# EAGLE board TMC2209_Camera_Slider_PCB_noPinguin (EAGLE 9.6.2)
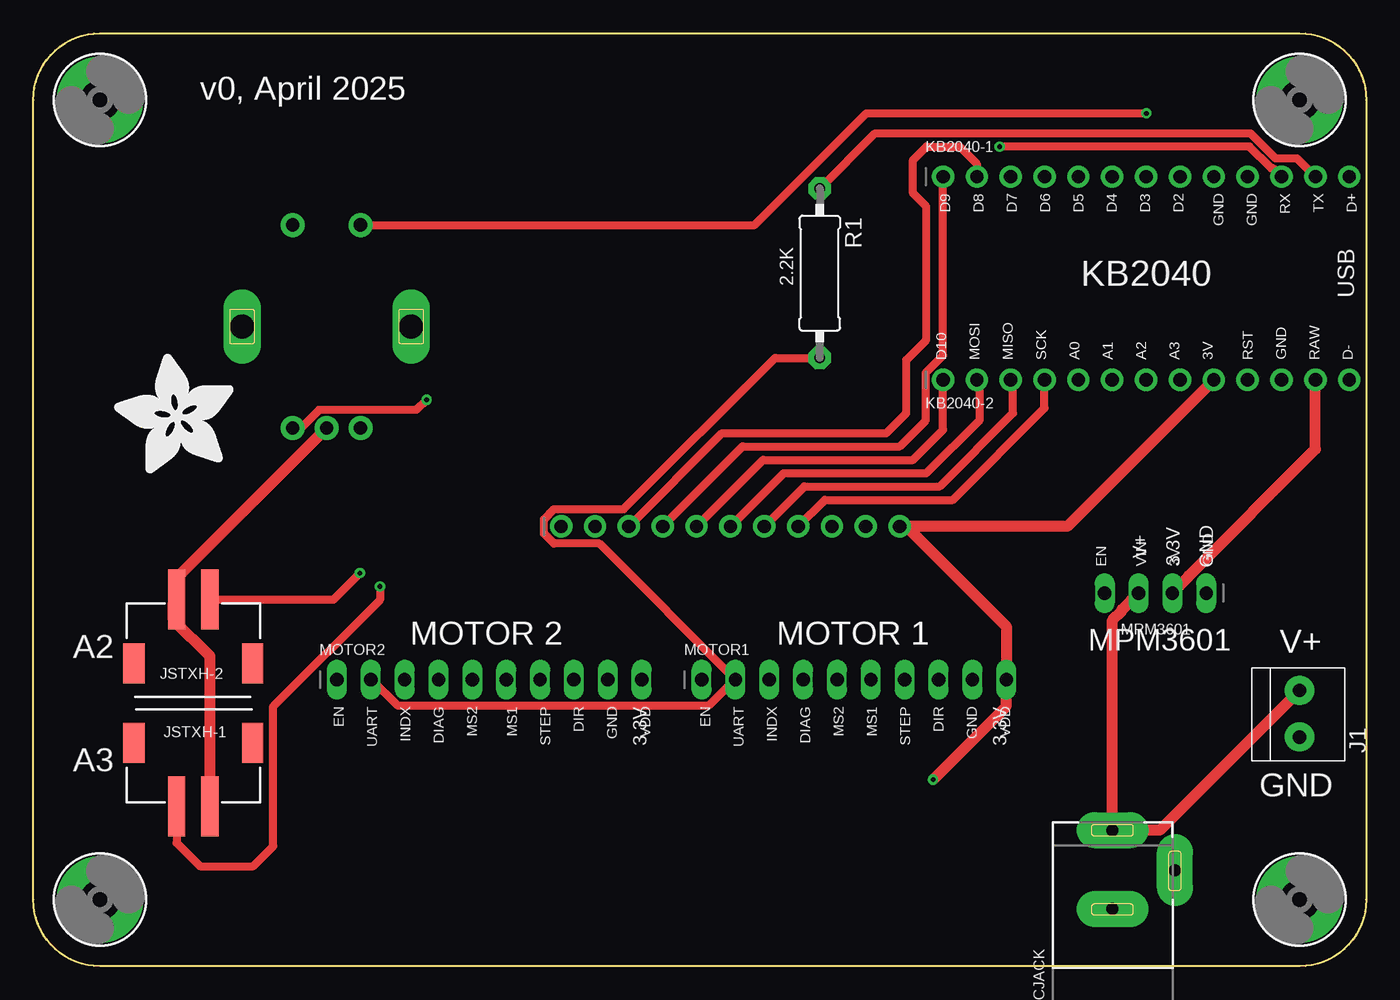
[diagram p0: board, top side]
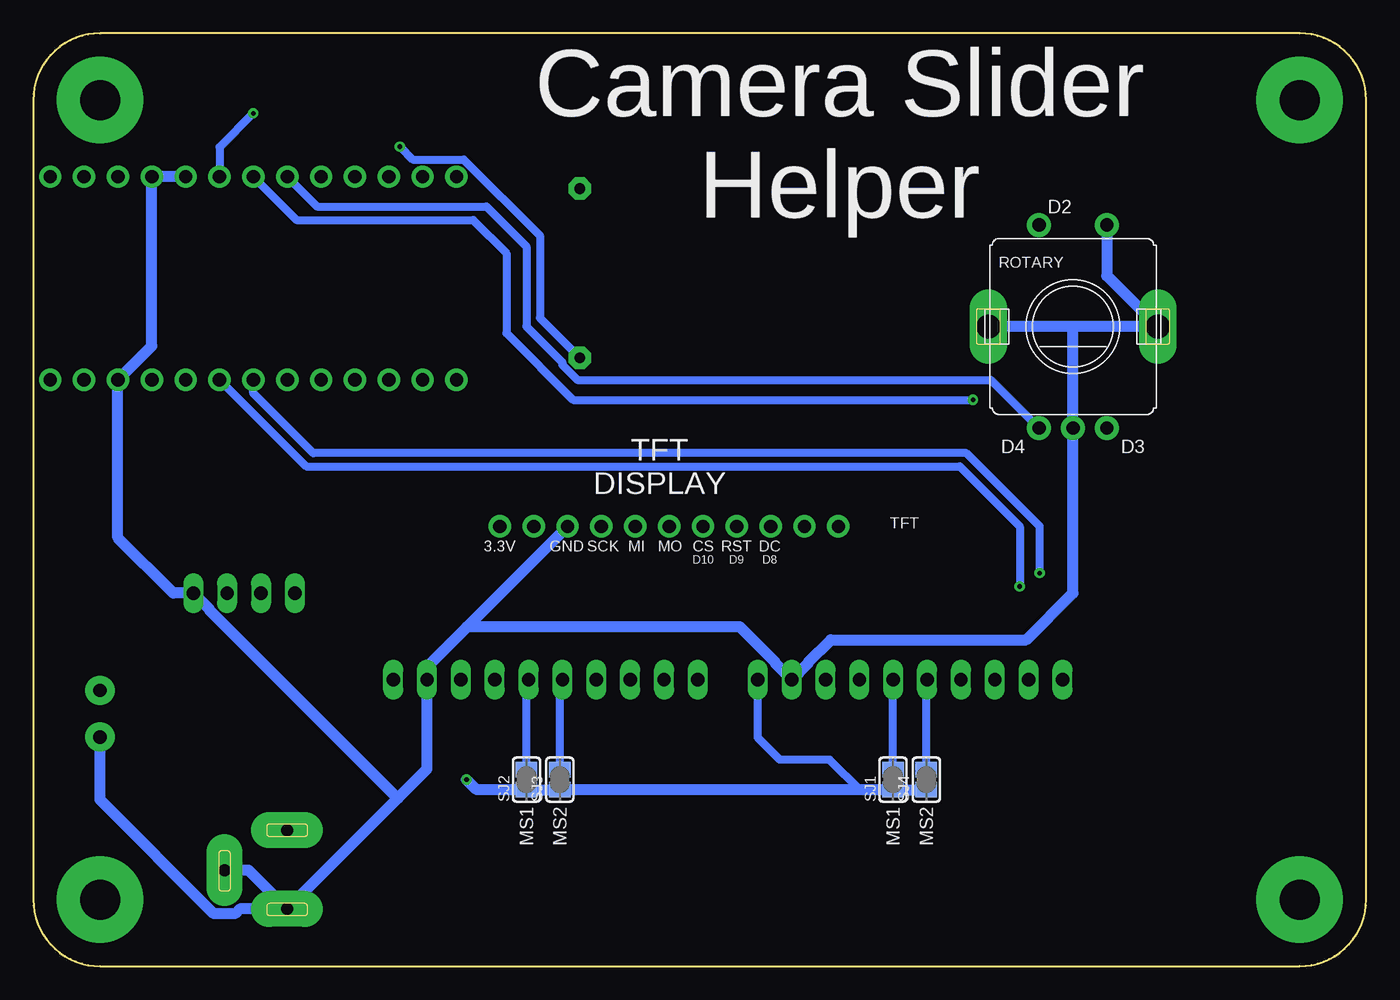
[diagram p1: board, bottom side, seen from below]

Size 100 x 70 mm. Coordinates in mm from the lower left corner, seen from the top.
Outline: 95,0 5,0 arc-90 0,5 0,65 arc-90 5,70 95,70 arc-90 100,65 100,5 arc-90 95,0
Copper layers (1*16): Top 0.035mm / dielectric 1.5mm / Bottom 0.035mm
Design rules "default *": minimum track width 6mil, minimum drill 0.35mm, track to track 6mil, track to pad 6mil, pad to pad 6mil, via to via 6mil, smd to smd 6mil, copper to edge 10mil, drill to drill 6mil, minimum pad ring 10mil, minimum via ring 8mil, stop-mask expansion 4mil, vias tented up to drill 0mil, thermal gap 10mil

## Footprints (pad centres in the part's own frame; a part is rotated, then mirrored left to right if it is on the bottom)
DCJACK_2MM_PTH = drill 0.9 pad 2.7 long: GND -2.9,2.54; GNDBREAK 0,-2.16; PWR 3,2.54
MOUNTINGHOLE_3.0_PLATED = drill 3 pad 6.452: P$1 0,0
1X2-3.5MM = drill 1 pad 2.184: 1 1.8,0; 2 -1.7,0
JST-XH-2-SV = smd 1.3 x 4.5: 1 -1.25,-2.014; 2 1.25,-2.014 | smd 1.6 x 3: MT1 -4.45,2.77; MT2 4.45,2.77
1X13_ROUND_70 = drill 1 pad 1.676: 1 -15.24,0; 2 -12.7,0; 3 -10.16,0; 4 -7.62,0; 5 -5.08,0; 6 -2.54,0; 7 0,0; 8 2.54,0; 9 5.08,0; 10 7.62,0; 11 10.16,0; 12 12.7,0; 13 15.24,0
1X10_OVAL = drill 1 long: 1 -11.43,0; 2 -8.89,0; 3 -6.35,0; 4 -3.81,0; 5 -1.27,0; 6 1.27,0; 7 3.81,0; 8 6.35,0; 9 8.89,0; 10 11.43,0
1X04_OVAL = drill 1 long: 1 -3.81,0; 2 -1.27,0; 3 1.27,0; 4 3.81,0
0309/12 = drill 0.813 pad 1.676 octagon: 1 -6.35,0; 2 6.35,0
PEC11+SWITCH = drill 1 pad 1.8: P$1 -2.54,7.62; P$2 2.54,7.62; P$A -2.54,-7.62; P$B 2.54,-7.62; P$C 0,-7.62 | drill 1.8 pad 2.8 long: P$GND1 -6.35,0; P$GND2 6.35,0
SOLDERJUMPER_CLOSEDWIRE = smd 1.168 x 1.6: 1 -0.762,0; 2 0.762,0 | smd 0.635 x 0.203: WIRE 0,0
SOLDERJUMPER_REFLOW = smd 1.168 x 1.6: 1 -0.762,0; 2 0.762,0
1X11_ROUND = drill 1 pad 1.676: 1 -12.7,0; 2 -10.16,0; 3 -7.62,0; 4 -5.08,0; 5 -2.54,0; 6 0,0; 7 2.54,0; 8 5.08,0; 9 7.62,0; 10 10.16,0; 11 12.7,0

## Placement (x,y rotation side)
DCJACK  [DCJACK_2MM_PTH]  83.5,7.2 90 top
E$1  [MOUNTINGHOLE_3.0_PLATED]  5,65 0 top
E$2  [MOUNTINGHOLE_3.0_PLATED]  95,65 0 top
E$3  [MOUNTINGHOLE_3.0_PLATED]  95,5 0 top
E$5  [MOUNTINGHOLE_3.0_PLATED]  5,5 0 top
J1  1X2-3.5MM  [1X2-3.5MM]  95,19 270 top
JSTXH-1  CON_JST_XH_2PIN-VERT  [JST-XH-2-SV]  12,14 0 top
JSTXH-2  CON_JST_XH_2PIN-VERT  [JST-XH-2-SV]  12,25.5 180 top
KB2040-1  [1X13_ROUND_70]  83.49,59.24 0 top
KB2040-2  [1X13_ROUND_70]  83.49,44 0 top
MOTOR1  [1X10_OVAL]  61.57,21.5 0 top
MOTOR2  [1X10_OVAL]  34.21,21.5 0 top
MPM3601  [1X04_OVAL]  84.19,28 180 top
R1  2.2K  [0309/12]  59,52 270 top
ROTARY  [PEC11+SWITCH]  22,48 0 bottom
SJ1  [SOLDERJUMPER_CLOSEDWIRE]  35.5,14 90 bottom
SJ2  [SOLDERJUMPER_REFLOW]  63,14 90 bottom
SJ3  [SOLDERJUMPER_REFLOW]  60.5,14 90 bottom
SJ4  [SOLDERJUMPER_REFLOW]  33,14 90 bottom
TFT  [1X11_ROUND]  52.3,33 0 top
U$1  [ADAFRUIT_9MM]  15,37 90 top

## Library data of the parts
DCJACK JSTXH-1 JSTXH-2 ROTARY = adafruit_electromech
E$1-E$3 E$5 KB2040-1 KB2040-2 MOTOR1 MOTOR2 MPM3601 SJ1-SJ4 TFT U$1 = microbuilder
J1 R1 = adafruit

## Nets
+3V3: KB2040-2.9 MOTOR1.10 MOTOR2.10 SJ1.1 SJ2.1 SJ3.1 SJ4.1 TFT.11
+5V: KB2040-2.12 MPM3601.2
A2: JSTXH-2.1 KB2040-2.7
A3: JSTXH-1.1 KB2040-2.8
CS: KB2040-2.1 TFT.5
D-: KB2040-2.13
DC: KB2040-1.2 TFT.3
EN_1: MOTOR1.1
EN_2: MOTOR2.1
ENC_A: KB2040-1.6 ROTARY.P$A
ENC_B: KB2040-1.7 ROTARY.P$B
ENC_BUTTON: KB2040-1.8 ROTARY.P$1
GND: DCJACK.GND DCJACK.GNDBREAK J1.1 JSTXH-1.2 JSTXH-2.2 KB2040-1.9 KB2040-1.10 KB2040-2.11 MOTOR1.9 MOTOR2.9 MPM3601.1 ROTARY.P$2 ROTARY.P$C ROTARY.P$GND1 ROTARY.P$GND2 TFT.9
LIT: TFT.1
MI: KB2040-2.3 TFT.7
MO: KB2040-2.2 TFT.6
MPM_EN: MPM3601.4
MS1_1: MOTOR1.6 SJ2.2
MS1_2: MOTOR2.6 SJ1.2
MS2_1: MOTOR1.5 SJ3.2
MS2_2: MOTOR2.5 SJ4.2
RST: KB2040-1.1 TFT.4
RX: KB2040-1.11 MOTOR1.2 MOTOR2.2 R1.2
SCK: KB2040-2.4 TFT.8
TX: KB2040-1.12 R1.1
VCC: DCJACK.PWR J1.2 MPM3601.3

## Tracks (layer width: path | path; a pad name or v marks a point on that pad's centre or on a via)
+3V3  (via drill 0.35)
  Top 0.813: v67.5,14 73,19.5 MOTOR1.10 73,25.5 65.5,33 TFT.11 77.57,33 KB2040-2.9
  Bottom 0.61: SJ1.1 38,13.24 40.26,15.5 44,15.5 45.64,17.14 MOTOR2.10
  Bottom 0.813: SJ4.1 SJ1.1 SJ3.1 61,13.24 SJ2.1 66.74,13.24 v67.5,14
+5V
  Top 0.813: MPM3601.2 86.69,29.23 86.69,29.3 96.19,38.8 KB2040-2.12
A2  (via drill 0.35)
  Top 0.61: JSTXH-2.1 22.51,27.51 v24.5,29.5
  Bottom 0.61: v24.5,29.5 24.5,33 30,38.5 79,38.5 83.49,42.99 KB2040-2.7
A3  (via drill 0.35)
  Top 0.61: v26,28.5 26,27.5 18,19.5 18,9 16.5,7.5 12.5,7.5 10.75,9.25 JSTXH-1.1
  Bottom 0.61: KB2040-2.8 79.53,37.5 30.5,37.5 26,33 v26,28.5
CS
  Top 0.61: TFT.5 54.76,38 66,38 68.25,40.25 KB2040-2.1
DC
  Top 0.61: TFT.3 51.68,40 64,40 65.5,41.5 65.5,45.5 67,47 67,57 66,58 66,60.5 67,61.5 69.5,61.5 70.79,60.21 KB2040-1.2
ENC_A
  Bottom 0.61: KB2040-1.6 78.71,57 66,57 63,54 63,48 60.3,45.3 60.3,45.11 59.18,44 28.16,44 ROTARY.P$A
ENC_B  (via drill 0.35)
  Top 0.61: ROTARY.P$B 20.08,40.38 21.44,41.74 28.74,41.74 v29.5,42.5
  Bottom 0.61: KB2040-1.7 80.25,56 67,56 64.5,53.5 64.5,47.5 59.5,42.5 v29.5,42.5
ENC_BUTTON  (via drill 0.35)
  Top 0.61: ROTARY.P$1 54.12,55.62 62.5,64 v83.5,64
  Bottom 0.61: v83.5,64 86.03,61.47 KB2040-1.8
GND
  Top 0.813: ROTARY.P$C 10.75,29.13 JSTXH-2.2 10.5,27.26 10.5,26 13.25,23.25 JSTXH-1.2
  Bottom 0.813: DCJACK.GND 72.63,12.63 | 72.63,12.63 70.46,14.8 MOTOR1.9 70.46,22.46 67.46,25.46 | TFT.9 67.46,25.46 | KB2040-1.9 KB2040-1.10 91.11,46.54 KB2040-2.11 93.65,32.15 89.5,28 MPM3601.1 86.77,26.77 86.77,26.7 72.7,12.63 72.63,12.63 | 22,48 ROTARY.P$GND2 19.46,51.81 ROTARY.P$2 | 22,48 ROTARY.P$GND1 | 22,48 ROTARY.P$C 22,28 25.5,24.5 40.17,24.5 41.87,22.8 41.87,22.73 MOTOR2.9 44.33,22.73 44.33,22.8 46.99,25.46 67.46,25.46 | DCJACK.GND 84.51,4.3 84.87,3.94 86.45,3.94 95,12.49 J1.1 | DCJACK.GND 83.86,7.2 DCJACK.GNDBREAK
MI
  Top 0.61: TFT.7 57.84,36 68,36 73.5,41.5 73.5,43.83 KB2040-2.3
MO
  Top 0.61: TFT.6 56.3,37 67,37 71,41 71,43.79 KB2040-2.2
MS1_1
  Bottom 0.61: SJ2.2 63,21.34 MOTOR1.6
MS1_2
  Bottom 0.61: SJ1.2 35.5,21.48 MOTOR2.6
MS2_1
  Bottom 0.61: SJ3.2 60.5,21.3 MOTOR1.5
MS2_2
  Bottom 0.61: SJ4.2 33,21.44 MOTOR2.5
RST
  Top 0.61: TFT.4 53.22,39 65,39 66.95,40.95 66.95,44.54 68.25,45.83 KB2040-1.1
RX  (via drill 0.35)
  Top 0.61: MOTOR2.2 25.39,21.5 27.36,19.54 50.64,19.54 52.61,21.5 MOTOR1.2 42.48,31.7 39.06,31.7 38.3,32.46 38.3,33.54 39.06,34.3 44.3,34.3 55.65,45.65 R1.2 | KB2040-1.11 93.02,59.87 92.88,59.87 91.24,61.5 v72.5,61.5
  Bottom 0.61: v72.5,61.5 71.53,60.53 67.71,60.53 62,54.82 62,48.65 R1.2
SCK
  Top 0.61: TFT.8 59.38,35 69,35 75.87,41.87 KB2040-2.4
TX
  Top 0.61: R1.1 63.15,62.5 91.32,62.5 93.19,60.63 94.8,60.63 KB2040-1.12
VCC
  Top 0.813: MPM3601.3 81.69,26.77 81.69,26.7 80.96,25.97 DCJACK.PWR 84.5,10.2 J1.2

## Text on the board
tPlace: v0, April 2025 | 📸 | 2.2K | 🐗 | KB2040 | USB | V+ | 3.3V | GND | MOTOR 2 | MOTOR 1 | A2 | MPM3601 | V+ | ⚡ | 3.3V | 3.3V | A3 | ⚡ | GND | ⚙️ | ⚙️
bPlace: 📷 | 🎥 | 📷 | 📷 | 🎥 | 🎥 | Camera Slider / Helper | 📷 | 📷 | 🎥 | 📷 | D2 | 📷 | 📷 | 📷 | 📷 | 🎥 | 📷 | 📷 | 🎥 | 🎥 | 📷 | 📷 | 🎥 | 📷 | 📷 | 🎥 | D3 | D4 | 🎥 | TFT / DISPLAY | 📷 | 📷 | 📷 | 🎥 | DC | RST | CS | MO | MI | SCK | GND | 3.3V | 📷 | D8 | D9 | D10 | 📷 | 📷 | 📷 | 📷 | 📷 | 📷 | 🎥 | 📷 | 🎥 | 📷 | 📷 | 🎥 | 🎥 | 📷 | MS2 | MS1 | MS2 | MS1 | 🎥 | 📷 | 📷 | 📷 | 🎥 | 🎥 | 📷
tNames: D9 | D8 | D7 | D6 | D5 | D4 | D3 | D2 | GND | GND | RX | TX | D+ | D10 | MOSI | MISO | SCK | A0 | A1 | A2 | A3 | 3V | RST | GND | RAW | D- | EN | VIN | 3V | GND | EN | UART | INDX | DIAG | MS2 | MS1 | STEP | DIR | GND | VDD | EN | UART | INDX | DIAG | MS2 | MS1 | STEP | DIR | GND | VDD